# Altium PCB MAGI'sBuckPower-TEST - 副本.PcbDoc
Units mm, origin at the board's own origin, x right, y up, seen from the top; angles counter-clockwise.
Board outline 292.61 x 172.21 mm, 2 copper layers (Top Layer, Bottom Layer); 27 components, 16 nets, 100 pads, 94 vias.
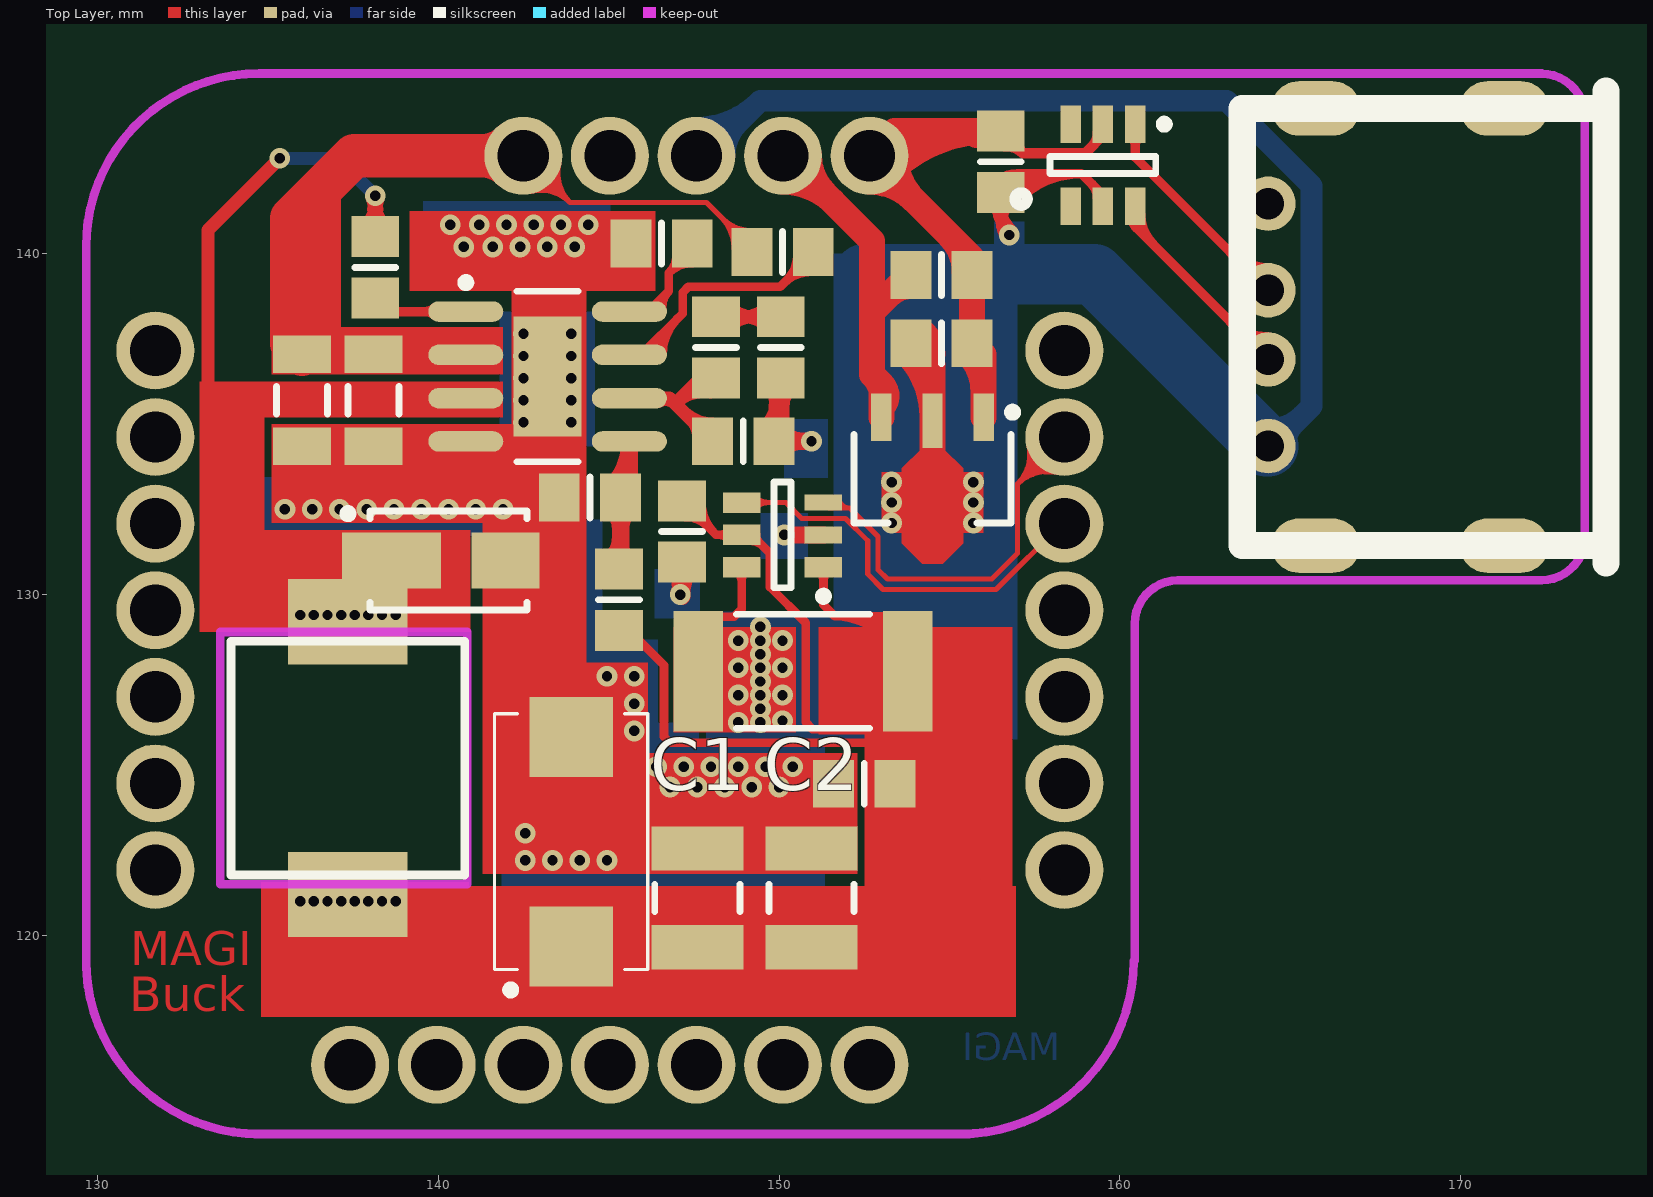
[diagram p0: Top Layer view]
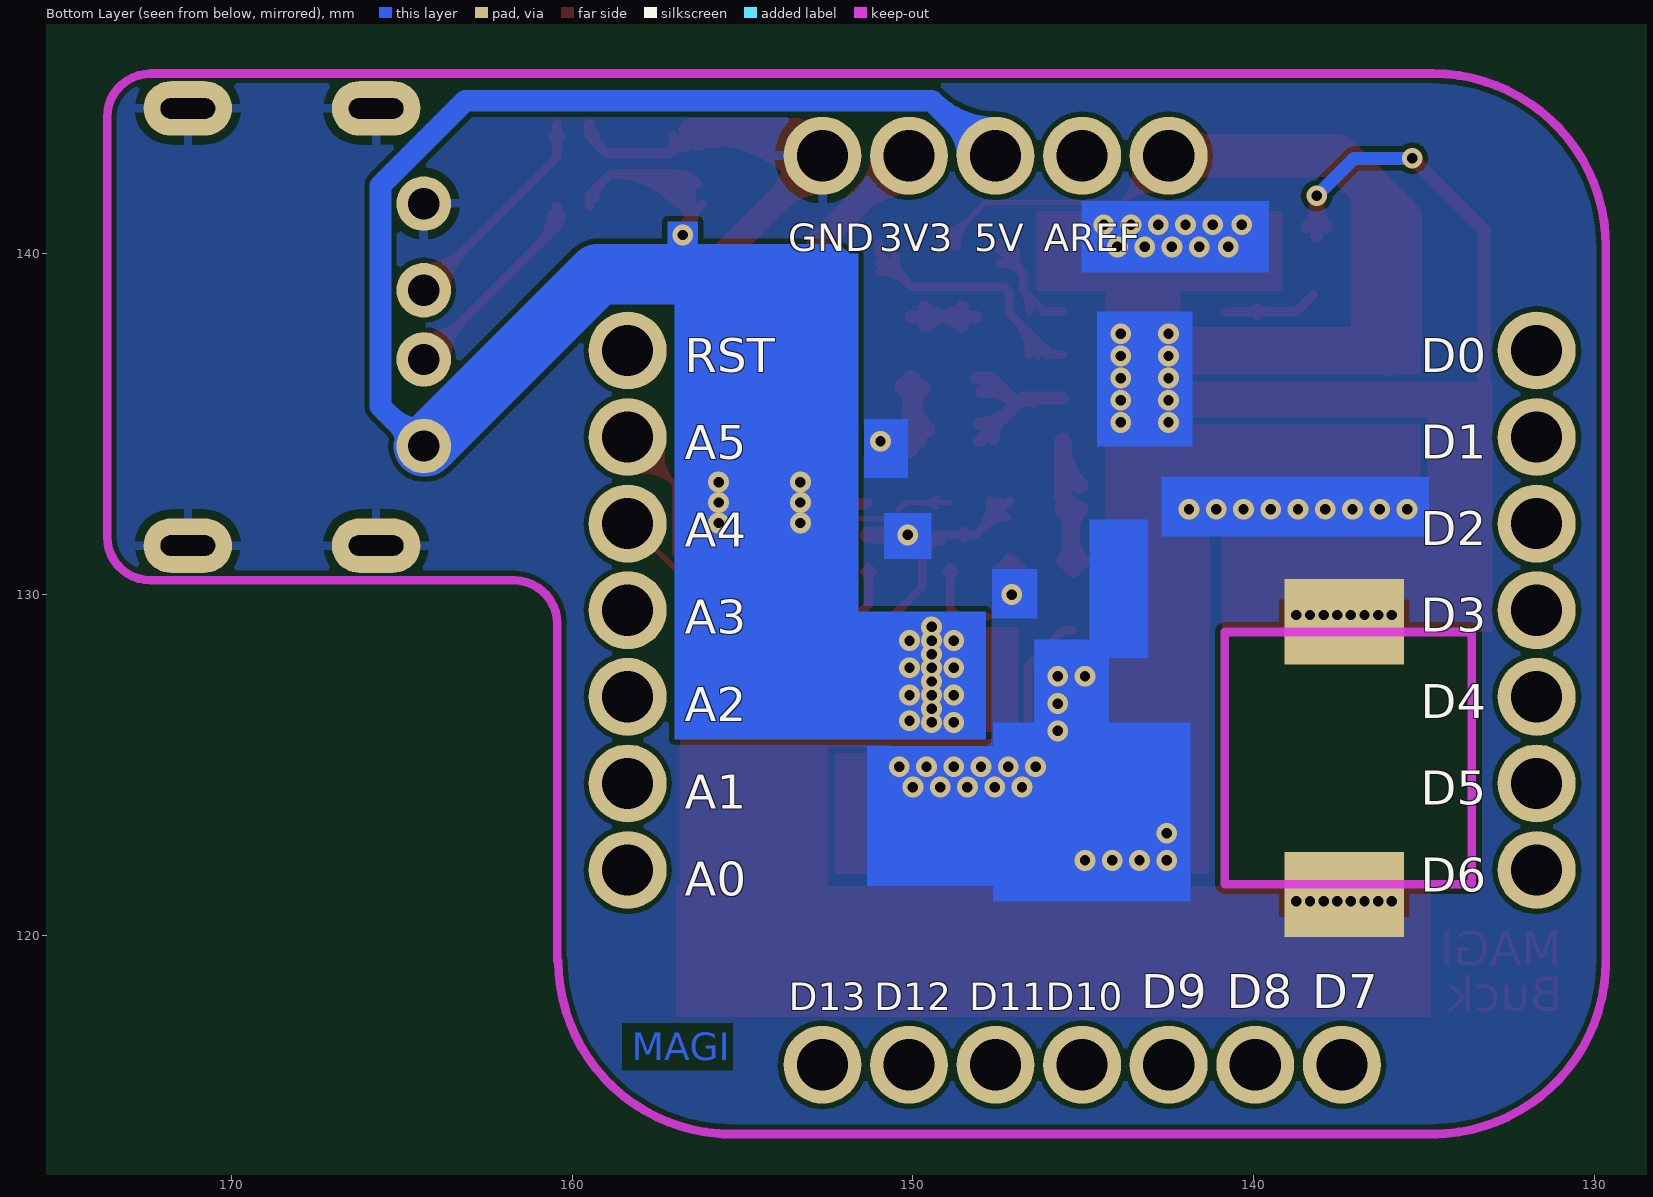
[diagram p1: Bottom Layer view, seen from below]

## Layer stack, top to bottom
Top Solder: solder mask 0.0102, Solder Resist, Dk 3.5
Top Layer: signal copper 0.0356
Dielectric1: dielectric 0.32, FR-4, Dk 4.8
Bottom Layer: signal copper 0.0356
Bottom Solder: solder mask 0.0102, Solder Resist, Dk 3.5

## Board outline
11.557,182.372 11.684,182.499 303.911,182.499 303.911,10.541 304.165,10.287 12.319,10.287

## Design rules (kind name [scope] priority, off if disabled: settings)
Clearance [All] p1: gap=0.152
ComponentClearance [InNet('No Net') vs InNet('No Net')] p1: gap=0.254 collisioncheckmode=3 verticalgap=0 showdistances=FALSE
HoleSize [All] p1: absolutevalues=TRUE maxlimit=3 minlimit=0.03 maxpercent=80.000 minpercent=20.000
PolygonConnect [All] p1: connectstyle=Relief reliefconductorwidth=0.254 reliefentries=4 polygonreliefangle="90 Angle" airgapwidth=0.254
RoutingVias [All] p1: holewidth=0.7 width=0.4 viastyle="Through Hole" minholewidth=0.305 minwidth=0.61 maxholewidth=2.54 maxwidth=3.81
SolderMaskExpansion [All] p1: expansion=0.102
Width [All] p1: maxlimit=25.4 minlimit=0.152 preferedwidth=0.254
27 further rules are at their usual default settings.

## Components (designator, comment, footprint, x,y, rotation, side; value= is the part's Value field where it differs from the comment)
C1 "10uf" C1210_N 147.6,121.1 r90 top
C2 "10uf" C1210_N 150.95,121.1 r90 top
C11 "10uf" 6-0805_N 154.764,137.374 r0 top
C28 "10nf" 6-0805_N 138.15,139.6 r270 top
C29 "0.1uf" 6-0805_N 146.55,140.3 r0 top
C30 "3.9nf" 6-0805_N 148.15,137.25 r90 top
C31 "CAP_1" C1206 136,135.7 r270 top
C32 "3.9nf" 6-0805_N 148.95,134.5 r0 top
C33 "10uf" 6-0805_N 156.5,142.7 r90 top
C34 "CAP_1" 6TPE330M 143.9,122.75 r90 top
C35 "0805" 6-0805_N 152.5,124.45 r180 top
C36 "10uf" 6-0805_N 154.764,139.374 r0 top
C37 "0805" 6-0805_N 147.15,131.85 r270 top
C39 "CAP_1" C1206 138.1,135.7 r270 top
D1 "DIODE_1" SMA 140.3,131 r0 top
J2 "USB1" USB-04A 165.05,137.85 r90 top
J3 "MAGI-M8" MAGIsBoard 145.034,129.54 r0 top
L2 "Inductor" 7*7 137.6,125.2 r270 top
R22 "RES1_1" 2512 150.7,127.75 r180 top
R25 "6.8K" 6-0805_N 150.05,137.25 r270 top
R26 "5K" 6-0805_N 145.3,129.85 r270 top
R27 "5K" 6-0805_N 144.45,132.85 r180 top
R28 "5K" 6-0805_N 150.1,140.05 r180 top
U3 "TPS2513" TPS2513 159.5,142.6 r270 top
U4 "MCP3421" tps2513 150.1,131.75 r180 top
U7 "HS7333" HS7333 154.5,133.4 r270 top
U8 "MP2307DN" MP2307DN 143.206,136.398 r0 top

## Footprints (in the part's own frame and the unit in brackets; to place one, negate y for a bottom-side part, rotate by r counter-clockwise, add the part's x,y. Pads: shape width x height; smd on the part's side, far side on the other; paste and mask are expansions set on the pad)
6-0805_N [mm] "Chip Resistor, Body 2.0x1.2mm, IPC Medium Density"
  rect 1.2x1.4 smd: 1(-0.9,0) 2(0.9,0)
  silkscreen extent 0,-0.6 0,0.6, body extent -1.07,-0.7 1.07,0.7, height 0.7
6TPE330M [mm] "Molded Capacitor, 2-Leads, Body 7.30x4.30mm, IPC Medium Density"
  rect 2.35x2.45 smd: 1(-3.075,0) 2(3.075,0)
  silkscreen extent -4.47,-2.25 3.75,2.25, body extent -3.75,-2.25 3.75,2.25, height 2
7*7 [mm]
  rect 2.5x3.5 all layers, no hole: 1(-4,-0.254) 2(4,-0.254)
  silkscreen extent -3.43,-3.68 3.43,3.18
2512 [mm]
  rect 1.45x3.55 smd: 1(-3.075,0) 2(3.075,0)
  silkscreen extent -1.95,-1.68 1.95,1.68, body extent -3.22,-1.7 3.22,1.7, height 0.65
C1206 [mm] "Chip Capacitor, Body 3.2x1.6mm, IPC High Density"
  rect 1.1x1.7 smd: 1(-1.35,0) 2(1.35,0)
  silkscreen extent -0.4,-0.75 0.4,0.75, body extent -1.7,-0.9 1.7,0.9, height 1.3
C1210_N [mm] "Chip Capacitor, Body 3.2x2.5mm, IPC Medium Density"
  rect 1.3x2.7 smd: 1(-1.45,0) 2(1.45,0)
  silkscreen extent -0.4,-1.25 0.4,1.25, body extent -1.7,-1.35 1.7,1.35, height 1.5
HS7333 [mm] "SOT89, 3-Leads, Body 4.50x2.50mm, Pitch 1.50mm, Lead Span 4.1mm, IPC Medium Density"
  rect 1.4x0.6 smd: 1(-1.8,1.5) 3(-1.8,-1.5)
  rect 1.6x0.6 smd: 2(-1.7,0)
  Top Layer region: -0.9,0.3 -0.3,0.9 1.9,0.9 2.5,0.3 2.5,-0.3 1.9,-0.9 -0.3,-0.9 -0.9,-0.3
  silkscreen extent -2.07,-2.3 1.3,2.48, body extent -1.3,-2.3 1.3,2.3, height 1.6
MAGIsBoard [mil]
  round 90 hole 59.06: 1(300,525) 2(200,525) 3(100,525) 4(0,525) 5(-100,525) 8(-525,300) 9(-525,200) 10(-525,100) 11(-525,0) 12(-525,-100) 13(-525,-200) 14(-525,-300) 15(-300,-525) 16(-200,-525) 17(-100,-525) 18(0,-525) 19(100,-525) 20(200,-525) 21(300,-525) 22(525,-300) 23(525,-200) 24(525,-100) 25(525,0) 26(525,100) 27(525,200) 28(525,300)
  Keep-Out Layer lines w10: -605,-415 -605,290 -605,420 cw(c-405,420) -405,620 ; -605,-405 ccw(c-405,-405) -405,-605 ; -410,-605 415,-605 ; 405,-605 ccw(c405,-405) 605,-405
  silkscreen extent 468,468 482,482
MP2307DN [mm] "SOIC, 8-Leads, Body 4.90x3.90mm, Pitch 1.27mm, Thermal Pad 3.51.2x2.00.2mm, IPC Medium Density"
  oval 2.2x0.6 smd: 1(-2.4,1.905) 2(-2.4,0.635) 3(-2.4,-0.635) 4(-2.4,-1.905) 5(2.4,-1.905) 6(2.4,-0.635) 7(2.4,0.635) 8(2.4,1.905)
  rect 2x3.51 smd: 9(0,0)
  silkscreen extent -2.52,-2.5 0.9,2.88, body extent -2,-2.5 2,2.5, height 1.7
SMA [mm] "Doide"
  rect 2.9x1.65 smd: 1(-1.675,0)
  rect 2x1.65 smd: 2(1.675,0)
  silkscreen extent -3.07,-1.45 2.3,1.5, body extent -2.3,-1.45 2.3,1.45, height 2.44
TPS2513 [mm]
  rect 1.1x0.6 smd: 1(-1.2,0.95) 2(-1.2,0) 3(-1.2,-0.95) 4(1.2,-0.95) 5(1.2,0) 6(1.2,0.95)
  silkscreen extent -1.32,-1.55 0.25,1.93, body extent -0.87,-1.52 0.87,1.53, height 1.45
tps2513 [mm]
  rect 1.1x0.6 smd: 1(-1.2,0.95) 4(1.2,-0.95) 5(1.2,0) 6(1.2,0.95)
  rect 1.1x0.508 smd: 2(-1.2,0)
  rect 1.1x0.457 smd: 3(-1.2,-0.95)
  silkscreen extent -1.33,-1.55 0.25,1.92, body extent -0.87,-1.52 0.87,1.53, height 1.45
USB-04A [mm]
  oval 1.6x2.6 hole 0.6 slot 1.6 at 90 deg: 0(-6.413,-0.699) 0(-6.413,-6.223) 0(6.413,-0.698) 0(6.414,-6.223)
  round 1.6 hole 0.92: 1(-3.492,0.698) 2(-0.953,0.698) 3(1.079,0.699) 4(3.619,0.699)
  silkscreen extent -6.92,-9.21 6.92,1.46

## Part data
C1 C2 C11 C33 C36: library part "CAPACITOR POL", "Capacitor"
C28 C29 C30 C32 C35 C37: library part CAP_1, "Capacitor"
C31 C34 C39: "Capacitor"
D1: "Diode"
R25 R26 R27 R28: library part RES1

## Via types
v1: diameter 0.61, hole 0.305, Top Layer to Bottom Layer, 94 vias

## Nets (pads, with @x,y where several pads share a name; then routed paths per layer and width w, separated by ;. In a path a pad name is that pad's centre, name@x,y a point inside that pad or via, vN(x,y) a via of type N, cw(c..) or ccw(c..) an arc to the next point about the centre after c; other vN are vias at no path point)
3.3V: C36.1 J3.2 U7.3 | length 15.7
  Top Layer w0.762: J3.2@150.114,142.113 cw(c150.114,139.995) 151.612,141.493 ; J3.2 150.229,142.875 152.731,140.373 152.731,138.295 ; J3.2@150.876,142.875 ccw(c152.437,142.875) 151.333,141.771 ; U7.3 153,136.184 ; U7.3@153.068,135.556 ccw(c152.644,135.828) 153,136.184 ; U7.3@153.081,135.599 ccw(c151.886,135.608) 152.731,136.453 ; 153.227,138.791 cw(c153.864,138.153) C36.1@153.864,139.055 ; C36.1 153.81,139.374 152.731,138.295 ; 152.731,136.453 153,136.184 ; 152.731,136.453 152.731,138.295
5SW: C28.1 D1.1 L2.1 U8.3 | length 15.5
  Top Layer w0.381: 133.25,134.95 133.25,140.7 v1(135.35,142.8) ; C28.1@137.86,140.79 ccw(c137.161,141.489) 138.15,141.489 ccw(c139.139,141.489) C28.1@138.44,140.79 ; v1@138.051,141.643 cw(c137.65,141.411) 138.097,141.292 ; C28.1 v1(138.15,141.7) ; 138.203,141.292 cw(c138.65,141.411) v1@138.249,141.643
  Bottom Layer w0.381: v1(135.35,142.8) 137.05,142.8 v1(138.15,141.7)
  other v1: 135.95,129.4 136.35,129.4 136.75,129.4 137.15,129.4 137.55,129.4 137.95,129.4 138.35,129.4 138.75,129.4
5V: C11.1 C33.1 J2.1 J3.3 R22.2 U3.5 U4.6 U7.2 | length 74.4
  Top Layer w0.254: R22.2@147.8,129.35 148.675,129.35 148.9,129.575 U4.6 ; U4.6@148.778,130.678 cw(c148.482,130.382) 148.9,130.382 cw(c149.318,130.382) U4.6@149.022,130.678
  Top Layer w0.279: C11.1 C11.1@153.864,137.489 ; C33.1@156.201,141.45 cw(c155.644,140.8) 156.5,140.8 ; C33.1@156.319,142.052 cw(c156.985,141.454) C33.1@156.985,142.35 ; C33.1@156.366,141.301 ccw(c157.334,141.561) v1@156.833,140.693 ; 156.421,141.096 ccw(c156.956,141.239) v1@156.797,140.708 ; 156.5,140.878 ccw(c157.078,140.878) v1@156.669,140.469 ; C33.1@156.5,141.552 ccw(c157.752,141.552) v1@156.867,140.667 ; C33.1@156.527,141.866 cw(c157.611,140.893) 157.611,142.35 ; v1@156.586,140.565 ccw(c156.291,140.591) 156.5,140.8 ; C33.1@156.735,141.679 cw(c158.237,140.332) 158.237,142.35 ; v1@156.735,140.714 cw(c156.709,141.009) 156.5,140.8 ; C33.1@156.799,141.45 ccw(c157.356,140.8) 156.5,140.8 ; v1@156.8,140.5 v1(156.75,140.55) 156.5,140.8 ; C33.1@156.943,141.493 cw(c158.863,139.771) 158.863,142.35 ; 159.182,142.031 cw(c158.8,141.65) U3.5@159.34,141.65 ; U3.5 159.5,141.713 158.863,142.35 ; 156.5,140.8 C33.1 157.05,142.35 158.863,142.35
  Top Layer w0.762: C11.1@153.71,137.119 cw(c151.802,135.211) U7.2@154.5,135.211 ; C11.1@153.864,137.055 cw(c153.864,136.285) C11.1@154.409,136.829 ; C11.1 154.5,136.738 154.5,133.4 ; C11.1@154.248,137.658 cw(c153.641,137.05) 154.5,137.05
  Bottom Layer w0.635: J3.3 147.833,142.875 149.446,144.488 163.129,144.488 165.621,141.996 165.621,135.521 J2.1@164.35,134.25 ; J3.3@147.574,143.701 ccw(c147.574,146.319) 149.425,144.467 ; J3.3@148.399,142.875 cw(c149.767,142.875) 148.8,143.842 ; 154.5,139 154.5,139.4 ; J2.1@164.352,134.84 ccw(c164.352,136.261) 165.356,135.256 ; J2.1@164.834,134.358 cw(c165.743,134.358) 165.1,135
  Bottom Layer w1.778: 152.5,139.4 154.5,139.4 159.245,139.4 164.287,134.358 J2.1
  other v1: 148.8,126.25 149.45,126.25 150.1,126.3 149.45,126.65 148.8,127.05 149.45,127.05 150.1,127.05 149.45,127.45 148.8,127.85 149.45,127.85 150.1,127.85 149.45,128.25 148.8,128.65 149.45,128.65 150.1,128.65 149.45,129.05 153.3,132.1 155.7,132.1 153.3,132.7 155.7,132.7 153.3,133.3 155.7,133.3
DM1: J2.2 U3.6 | length 12
  Top Layer w0.279: U3.6@160.331,141.15 ccw(c160.891,141.15) 160.495,140.754 ; U3.6@160.345,141.029 cw(c160.146,140.799) 160.45,140.799 ; U3.6 160.45,140.799 ; U3.6@160.555,141.029 ccw(c160.754,140.799) 160.45,140.799 ; U3.6@160.61,141.15 ccw(c161.845,141.15) 160.972,140.277 ; J2.2@163.691,136.898 ccw(c162.097,136.898) 163.224,138.025 ccw(c164.352,139.152) J2.2@164.352,137.558 ; J2.2@163.971,136.898 ccw(c163.051,136.898) 163.701,137.548 ccw(c164.352,138.198) J2.2@164.352,137.278 ; J2.2 160.45,140.799
DP1: J2.3 U3.1 | length 11
  Top Layer w0.279: U3.1@160.337,143.437 cw(c160.063,143.163) 160.45,143.163 cw(c160.837,143.163) U3.1@160.563,143.437 ; U3.1 160.45,142.831 J2.3 ; J2.3@163.691,138.93 ccw(c162.097,138.93) 163.224,140.057 ccw(c164.352,141.184) J2.3@164.352,139.59 ; J2.3@163.971,138.93 ccw(c163.051,138.93) 163.701,139.58 ccw(c164.352,140.23) J2.3@164.352,139.31
GND: C1.2 C2.2 C11.2 C29.1 C31.2 C32.2 C33.2 C34.2 C35.2 C36.2 C37.2 C39.2 D1.2 J2.0 J2.4 J3.1 R25.2 R27.2 U3.2 U4.2 U7.1 U8.4 U8.9 | length 41.2
  Top Layer w0.305: C33.2 157.155,142.945 ; C33.2@156.62,143.153 cw(c156.652,142.442) 157.155,142.945 ; C33.2@157.027,143.466 ccw(c157.521,143.311) 157.155,142.945 ; 159.191,143.16 ccw(c158.8,143.55) U3.2@159.352,143.55 ; U3.2 159.5,143.469 158.976,142.945 157.155,142.945
  Top Layer w0.508: C37.2@146.905,130.705 cw(c146.315,130.115) 147.15,130.115 cw(c147.985,130.115) C37.2@147.395,130.705 ; v1@147.056,130.025 ccw(c146.719,130.22) 147.095,130.32 ; v1(147.1,130) 147.15,129.95 C37.2 ; C32.2@149.605,134.845 ccw(c148.532,135.918) R25.2@150.05,135.918 ; R25.2@149.744,136.072 cw(c149.426,135.645) 149.94,135.508 ; R25.2@149.805,136.105 cw(c149.215,135.515) 150.05,135.515 cw(c150.885,135.515) R25.2@150.295,136.105 ; R25.2 150.05,134.7 C32.2 v1(150.95,134.5) ; C32.2@150.095,134.255 cw(c150.685,133.665) 150.685,134.5 cw(c150.685,135.335) C32.2@150.095,134.745 ; v1(150.15,131.75) U4.2
  Top Layer w0.762: J3.1@152.654,142.113 cw(c152.654,140.273) 153.955,141.574 cw(c155.256,142.875) J3.1@153.416,142.875 ; J3.1@153.193,142.336 cw(c156.244,139.285) C33.2@156.244,143.6 ; 154.404,143.6 ccw(c154.404,141.125) J3.1 ; 155.014,140.515 cw(c153.973,139.474) C36.2@155.445,139.474 ; C11.2@155.51,137.119 cw(c154.326,135.935) 156,135.935 ; 155.785,143.477 cw(c155.957,142.833) C33.2@156.29,143.41 ; U7.1 156,137.038 C11.2 C36.2 155.664,139.865 J3.1 ; C33.2 153.379,143.6 J3.1
  other v1: 142.55,122.2 143.35,122.2 144.15,122.2 144.95,122.2 142.55,123 146.8,124.35 147.6,124.35 148.4,124.35 149.2,124.35 150,124.35 146.4,124.95 147.2,124.95 148,124.95 148.8,124.95 149.6,124.95 150.4,124.95 145.75,126 145.75,126.8 144.95,127.6 145.75,127.6 135.5,132.5 136.3,132.5 137.1,132.5 137.9,132.5 138.7,132.5 139.5,132.5 140.3,132.5 141.1,132.5 141.9,132.5 142.5,135.05 143.9,135.05 142.5,135.7 143.9,135.7 142.5,136.35 143.9,136.35 142.5,137 143.9,137 142.5,137.65 143.9,137.65 140.75,140.2 141.6,140.2 142.4,140.2 143.2,140.2 144,140.2 140.35,140.85 141.2,140.85 142,140.85 142.8,140.85 143.6,140.85 144.4,140.85
NetC28_2: C28.2 U8.1 | length 3.4
  Top Layer w0.279: C28.2@138.25,138.8 138.747,138.303 U8.1 ; U8.1@139.893,138.19 ccw(c139.619,137.916) 139.619,138.303 ccw(c139.619,138.69) U8.1@139.893,138.416
NetC29_2: C29.2 U8.8 | length 5.2
  Top Layer w0.254: U8.8 146.164,138.303 146.764,138.903 ; U8.8@146.577,138.33 cw(c147.235,138.432) 146.764,138.903 ; 146.776,139.448 cw(c147.45,138.774) C29.2@147.45,139.727 ; C29.2@146.984,140.122 cw(c146.209,139.991) 146.764,139.436 ; C29.2 147.45,140.122 146.764,139.436 ; 146.764,138.903 146.764,139.436
NetC30_1: C30.1 C32.1 U8.6 | length 8.3
  Top Layer w0.381: U8.6 146.787,135.763 146.95,135.6 ; U8.6@146.46,135.668 cw(c146.66,135.31) 146.95,135.6 ; 147.18,135.37 ccw(c148.05,136.24) C32.1@148.05,135.01 ; 147.422,135.128 cw(c146.893,134.6) C32.1@147.641,134.6 ; C30.1@147.486,136.136 cw(c147.951,135.672) C30.1@148.046,136.322 ; C30.1@147.991,135.945 ccw(c147.814,134.737) 146.95,135.6 ; C32.1 146.95,135.6 ; C30.1 147.7,136.35 146.95,135.6
NetC30_2: C30.2 R25.1 | length 5
  Top Layer w0.381: C30.2 R25.1 ; C30.2@148.54,137.86 cw(c149.239,137.161) 149.239,138.15 cw(c149.239,139.139) C30.2@148.54,138.44 ; R25.1@149.66,137.86 ccw(c148.961,137.161) 148.961,138.15 ccw(c148.961,139.139) R25.1@149.66,138.44
NetR26_1: R26.1 R27.1 U8.5 | length 7.8
  Top Layer w0.508: R26.1@145.055,130.995 ccw(c144.344,131.706) 145.35,131.706 ; R27.1@145.105,132.505 cw(c144.515,131.915) 145.35,131.915 cw(c146.185,131.915) R27.1@145.595,132.505 ; R27.1@145.105,133.195 ccw(c143.897,134.403) U8.5@145.606,134.403 ; R26.1 145.35,130.8 145.35,132.6 145.606,132.856 U8.5 ; 145.35,131.465 ccw(c146.015,131.465) R26.1@145.545,130.995
NetR28_1: R28.1 U8.7 | length 11.7
  Top Layer w0.254: U8.7 145.955,137.033 147.171,138.248 147.171,138.866 147.334,139.029 150.029,139.029 151,140 R28.1@151,140.3 ; U8.7@146.071,137.033 cw(c146.35,137.033) U8.7@146.153,137.23 ; U8.7@146.325,137.033 cw(c147.217,137.033) 146.586,137.664 ; U8.7@146.579,137.033 cw(c148.085,137.033) 147.02,138.098 ; 150.107,139.107 cw(c151,138.214) R28.1@151,139.477 ; 150.228,139.228 ccw(c149.506,139.95) R28.1@150.527,139.95 ; R28.1@150.541,139.541 cw(c151,139.082) R28.1@151,139.731
SCL: J3.27 U4.3 | length 18.8
  Top Layer w0.152: U4.3 151.463,132.537 152.071,132.537 ; U4.3@151.621,132.7 ccw(c151.853,132.784) 151.853,132.537 ; U4.3@151.765,132.752 ccw(c152.071,132.863) 152.071,132.537 ; J3.27@157.328,134.387 cw(c156.128,134.118) 156.997,133.248 ; J3.27@157.477,134.42 cw(c156.448,134.19) 157.193,133.444 cw(c157.939,132.699) J3.27@158.169,133.728 ; J3.27@157.625,134.454 cw(c156.768,134.262) 157.389,133.64 cw(c158.011,133.019) J3.27@158.203,133.876 ; J3.27@158.136,133.579 ccw(c157.867,132.379) 156.997,133.248 ; J3.27 156.997,133.248 ; 152.071,132.537 152.905,131.704 152.905,130.726 153.176,130.455 156.241,130.455 156.997,131.211 156.997,133.248
  Top Layer w0.254: U4.3 U4.3@151.595,132.7
SDA: J3.26 U4.4 | length 12.7
  Top Layer w0.152: U4.4 150.198,132.7 150.666,132.233 151.945,132.233 152.6,131.577 152.6,130.6 153.05,130.15 156.367,130.15 158.297,132.08 J3.26 ; U4.4@149.308,132.542 cw(c149.69,132.16) 149.69,132.7 cw(c149.69,133.24) U4.4@149.308,132.858
SWO: C1.1 C2.1 C34.1 C35.1 C37.1 L2.2 R22.1 R26.2 U4.1 U4.5 | length 34.8
  Top Layer w0.254: R26.2 145.595,128.95 146.621,127.925 146.621,125.834 146.805,125.65 152.75,125.65 152.85,125.55 ; C37.1 148.15,131.75 U4.5 149.195,131.75 149.729,131.216 149.729,130.221 150.779,129.171 150.779,126.25 150.979,126.05 151.3,126.05 ; C37.1@147.25,132.277 cw(c147.25,131.377) 147.887,132.013 ; C37.1@147.469,132.75 ccw(c148.239,132.75) C37.1@147.695,132.205 ; C37.1@147.723,132.75 ccw(c149.106,132.75) 148.128,131.772 ; U4.5@148.528,131.628 ccw(c148.232,131.332) 148.232,131.75 ccw(c148.232,132.168) U4.5@148.528,131.872 ; U4.5@149.15,131.577 cw(c149.15,131.05) 149.522,131.423 ; U4.5@149.323,131.75 ccw(c149.632,131.75) U4.5@149.413,131.532 ; U4.1@151.178,130.678 cw(c150.882,130.382) 151.3,130.382 cw(c151.718,130.382) U4.1@151.422,130.678 ; U4.1 151.3,129.7 151.634,129.366 ; 152.101,129.366 cw(c152.101,127.716) R22.1@153.486,128.613 ; 152.569,129.366 cw(c152.569,128.018) R22.1@153.699,128.751 ; 153.036,129.366 cw(c153.036,128.321) R22.1@153.913,128.889 ; R22.1@153.273,128.475 ccw(c151.634,127.413) 151.634,129.366 ; R22.1 153.775,128.95 153.359,129.366 151.634,129.366
  other v1: 135.95,121 136.35,121 136.75,121 137.15,121 137.55,121 137.95,121 138.35,121 138.75,121
VIN: C31.1 C39.1 J3.5 R28.2 U8.2 | length 31.3
  Top Layer w0.152: J3.5 143.866,141.503 ; J3.5@142.66,142.131 cw(c142.852,141.274) 143.474,141.895 cw(c144.095,142.517) J3.5@143.238,142.709 ; J3.5@142.694,141.983 cw(c142.924,140.954) 143.67,141.699 cw(c144.415,142.445) J3.5@143.386,142.675 ; J3.5@142.727,141.834 cw(c142.996,140.634) 143.866,141.503 ; J3.5@143.535,142.642 ccw(c144.735,142.373) 143.866,141.503 ; 148.289,141.084 cw(c147.355,140.15) R28.2@148.676,140.15 ; 148.346,141.028 ccw(c149.2,141.882) R28.2@149.2,140.674 ; 148.55,140.824 cw(c147.876,140.15) R28.2@148.829,140.15 ; 148.606,140.768 ccw(c149.2,141.362) R28.2@149.2,140.521 ; R28.2 149.2,140.173 147.87,141.503 143.866,141.503
  Top Layer w1.27: C31.1 135.7,137.35 135.7,141.05 137.525,142.875 J3.5 ; J3.5@142.135,142.516 ccw(c141.268,141.649) 141.268,142.875 ccw(c141.268,144.101) J3.5@142.135,143.234
pads on no net: J3.4 J3.8 J3.9 J3.10 J3.11 J3.12 J3.13 J3.14 J3.15 J3.16 J3.17 J3.18 J3.19 J3.20 J3.21 J3.22 J3.23 J3.24 J3.25 J3.28 U3.3 U3.4

## Polygon pours and split planes (outlines as drawn)
GND on Bottom Layer "Keep-Out Layer-No Net" (solid, remove dead copper, pour order 5): 129.21,145.584 129.21,114.084 159.61,114.084 160.36,114.084 160.36,129.084 160.36,129.134 161.31,129.134 161.46,129.134 161.46,130.334 173.66,130.334 173.76,130.334 173.76,145.634 173.76,145.684 129.31,145.684

## Keep-outs
Keep-Out Layer:
  lines w0.254: 134.747,145.288 172.37,145.288 ; 160.433,119.253 160.433,129.147 cw(c161.703,129.147) 161.703,130.417 ; 161.703,130.422 172.37,130.422 ccw(c172.37,131.692) 173.64,131.692 173.64,144.011 ccw(c172.37,144.011) 172.37,145.281 ; 133.6,121.5 133.6,128.9 140.85,128.9 140.85,121.5 133.6,121.5

## Other copper
Top Layer:
  rectangle net GND: 142.15,121.8 144.35,141.15
  rectangle net GND: 142.151,121.8 152.3,125.35
  rectangle net GND: 142.15,125.15 146.15,128
  rectangle net GND: 135.1,132.1 144.2,135
  rectangle net GND: 139.15,138.9 146.366,141.25
  rectangle net VIN: 135.1,136.45 141.9,137.85
  rectangle net SWO: 152.5,119.8 156.85,129.05
  rectangle net 5V: 146.9,125.95 150.5,129.05
  rectangle net 5SW: 134.65,135.2 141.9,136.25
  rectangle net 5SW: 133,129.75 134.9,136.25
  rectangle net 5SW: 133,128.9 140.95,131.9
  rectangle net SWO: 136.35,117.6 156.95,121.45
  rectangle net SWO: 134.8,117.604 140.9,121.55
  rectangle net VIN: 136,137.7 137.15,141.9
  rectangle net 5V: 153,132.05 156,133.6
  rectangle net 5V: 153.3,131.8 156,132.1
  rectangle net SWO: 151.15,125.9 154.7,129.05
  rectangle net GND: 141.3,121.8 143.15,132.65
  text "MAGI" at 130.96,119.13 h1
  text "Buck" at 130.94,117.78 h1.02
Bottom Layer:
  rectangle net 5V: 147.85,125.8 150.9,129.5
  rectangle net 5V: 147.85,125.75 156.85,129.5
  rectangle net 5V: 151.6,125.75 157,140
  rectangle net 5V: 156.3,140.15 157.2,140.95
  rectangle net GND: 147.6,121.45 151.35,125.55
  rectangle net GND: 141.85,121 147.65,126.25
  rectangle net GND: 134.85,131.7 142.7,133.45
  rectangle net GND: 143.1,128.144 144.823,132.2
  rectangle net GND: 144.25,125.35 146.45,128.682
  rectangle net GND: 146.35,129.303 147.685,130.75
  rectangle net GND: 150.15,133.413 151.435,135.15
  rectangle net GND: 149.45,131.05 150.85,132.4
  rectangle net GND: 141.8,134.35 144.6,138.3
  rectangle net GND: 139.55,139.45 145.05,141.55

## Silkscreen, mask and mechanical layers (free items; w line width, h text height)
Top Solder:
  rectangle: 139.15,138.9 141.1,141.25
  rectangle: 135.05,138.95 137.15,141.2
  region: 154.2,130.9 153.6,131.5 153.6,133.7 154.2,134.3 154.8,134.3 155.4,133.7 155.4,131.5 154.8,130.9
Bottom Solder:
  rectangle: 142.113,134.112 144.272,138.684

## Text inside footprints (layer, text, board x,y; h text height)
J3: Bottom Overlay "AREF" at 146.166,140.077 h0.8; Bottom Overlay "5V" at 148.198,140.077 h0.8; Bottom Overlay "3V3" at 150.992,140.077 h0.8; Bottom Overlay "GND" at 153.659,140.077 h0.8; Bottom Overlay "RST" at 156.692,136.527 h1; Bottom Overlay "A5" at 156.692,133.966 h1; Bottom Overlay "A4" at 156.692,131.405 h1; Bottom Overlay "A3" at 156.692,128.843 h1; Bottom Overlay "A2" at 156.692,126.282 h1; Bottom Overlay "A1" at 156.692,123.721 h1; Bottom Overlay "A0" at 156.692,121.16 h1; Bottom Overlay "D13" at 153.644,117.804 h0.8; Bottom Overlay "D12" at 151.129,117.804 h0.8; Bottom Overlay "D11" at 148.348,117.804 h0.8; Bottom Overlay "D10" at 146.1,117.804 h0.8; Bottom Overlay "D9" at 143.306,117.858 h1; Bottom Overlay "D8" at 140.792,117.858 h1; Bottom Overlay "D7" at 138.277,117.858 h1; Bottom Overlay "D6" at 135.102,121.287 h1; Bottom Overlay "D5" at 135.102,123.827 h1; Bottom Overlay "D4" at 135.102,126.367 h1; Bottom Overlay "D3" at 135.102,128.907 h1; Bottom Overlay "D2" at 135.102,131.447 h1; Bottom Overlay "D1" at 135.102,133.987 h1; Bottom Overlay "D0" at 135.102,136.527 h1; Bottom Layer "MAGI" at 158.242,116.332 h0.8